# Altium PCB biv2-LRP_1a.PcbDoc
Units mm, origin at the board's own origin, x right, y up, seen from the top; angles counter-clockwise.
Board outline 54 x 54 mm, 2 copper layers (Top Layer, Bottom Layer), stack 1.535 mm thick; 53 components, 21 nets, 124 pads, 67 vias.
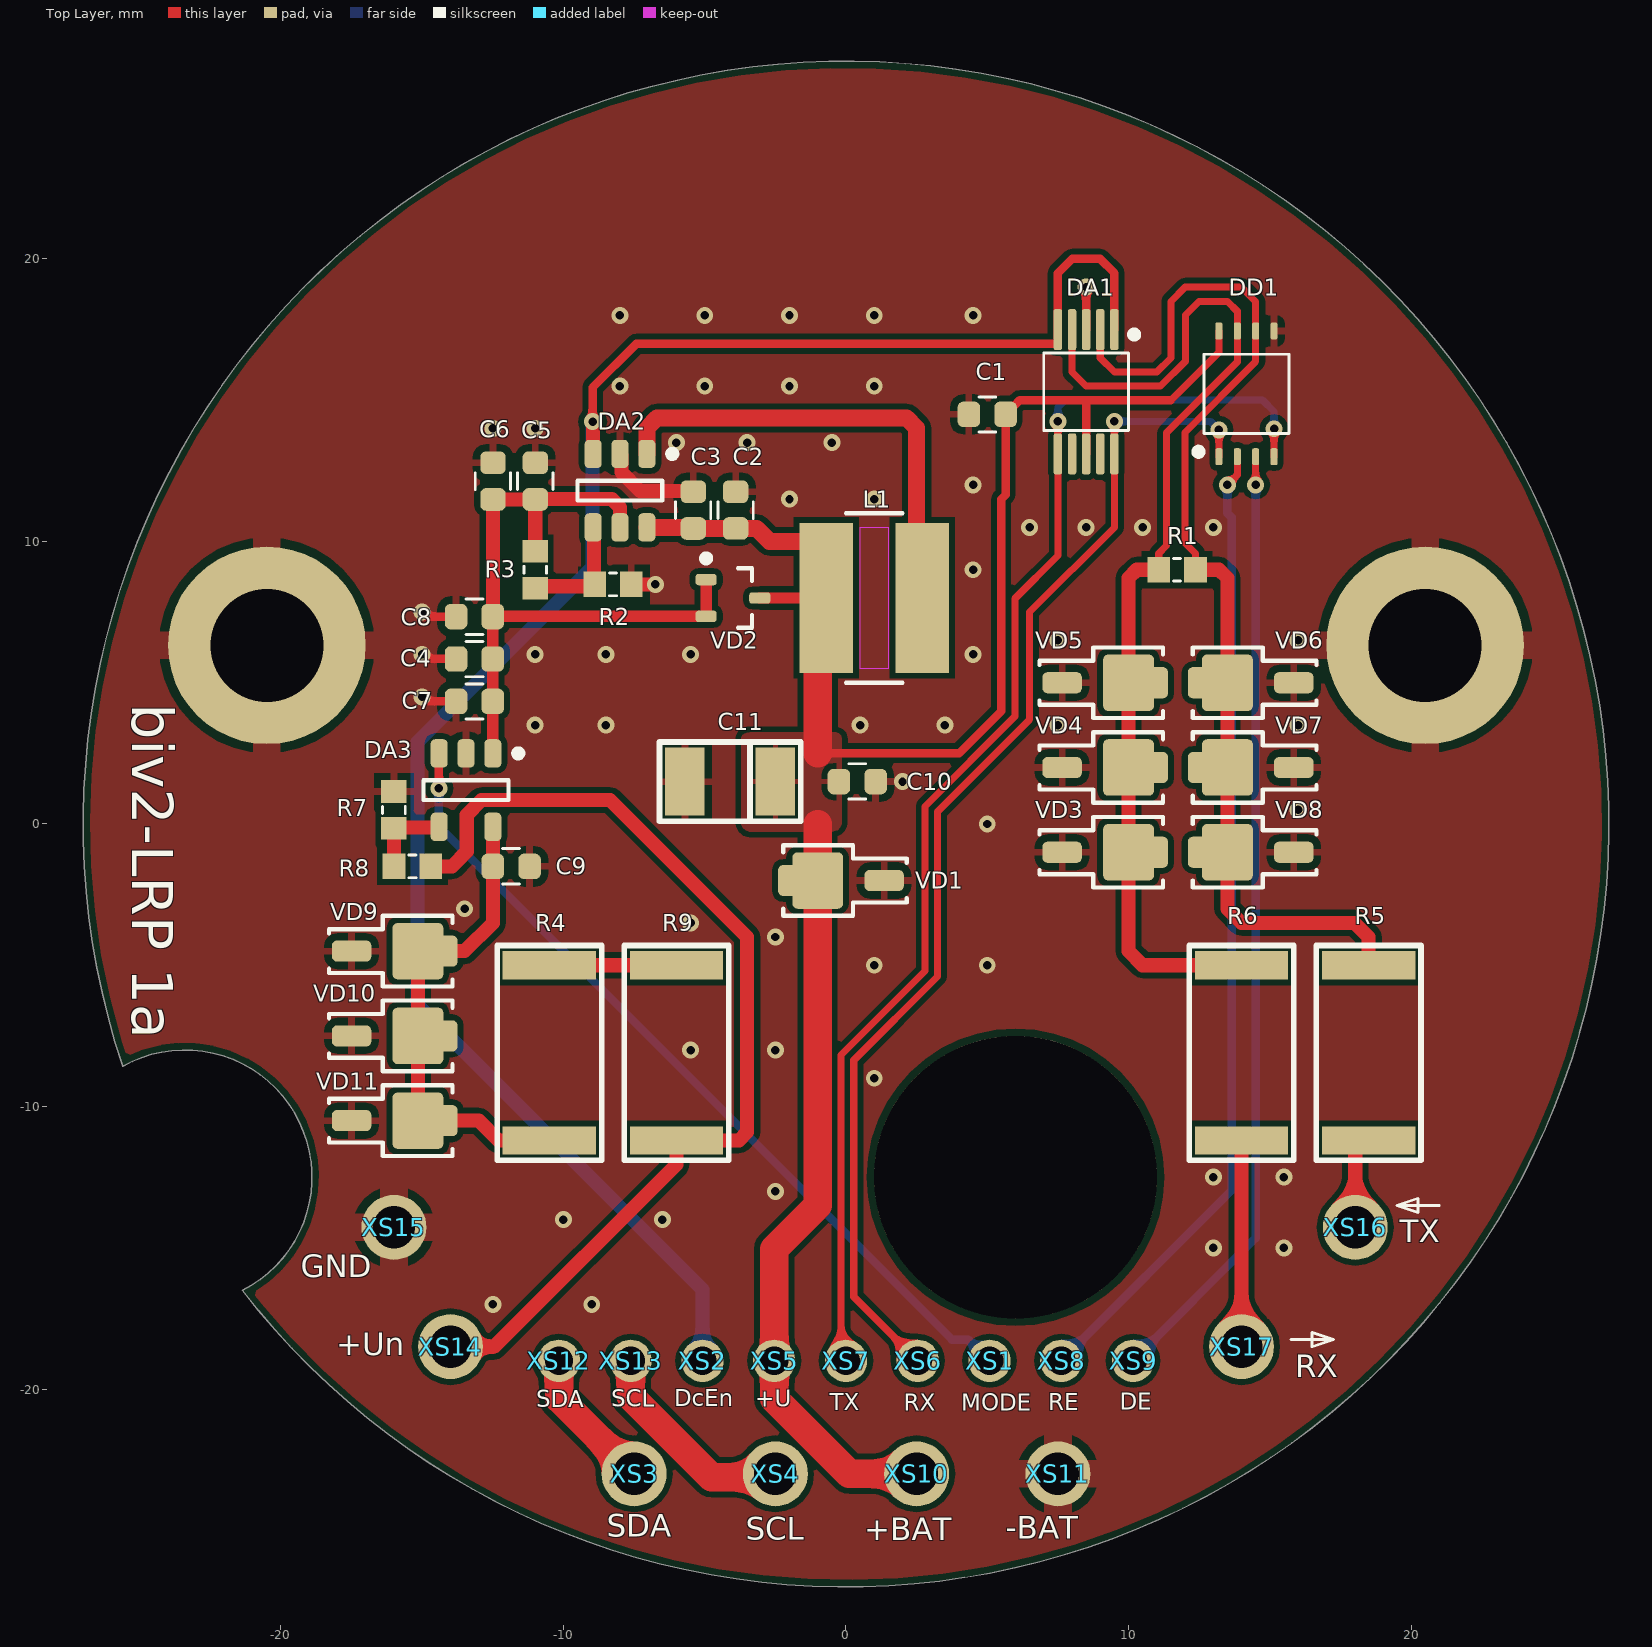
[diagram p0: Top Layer view]
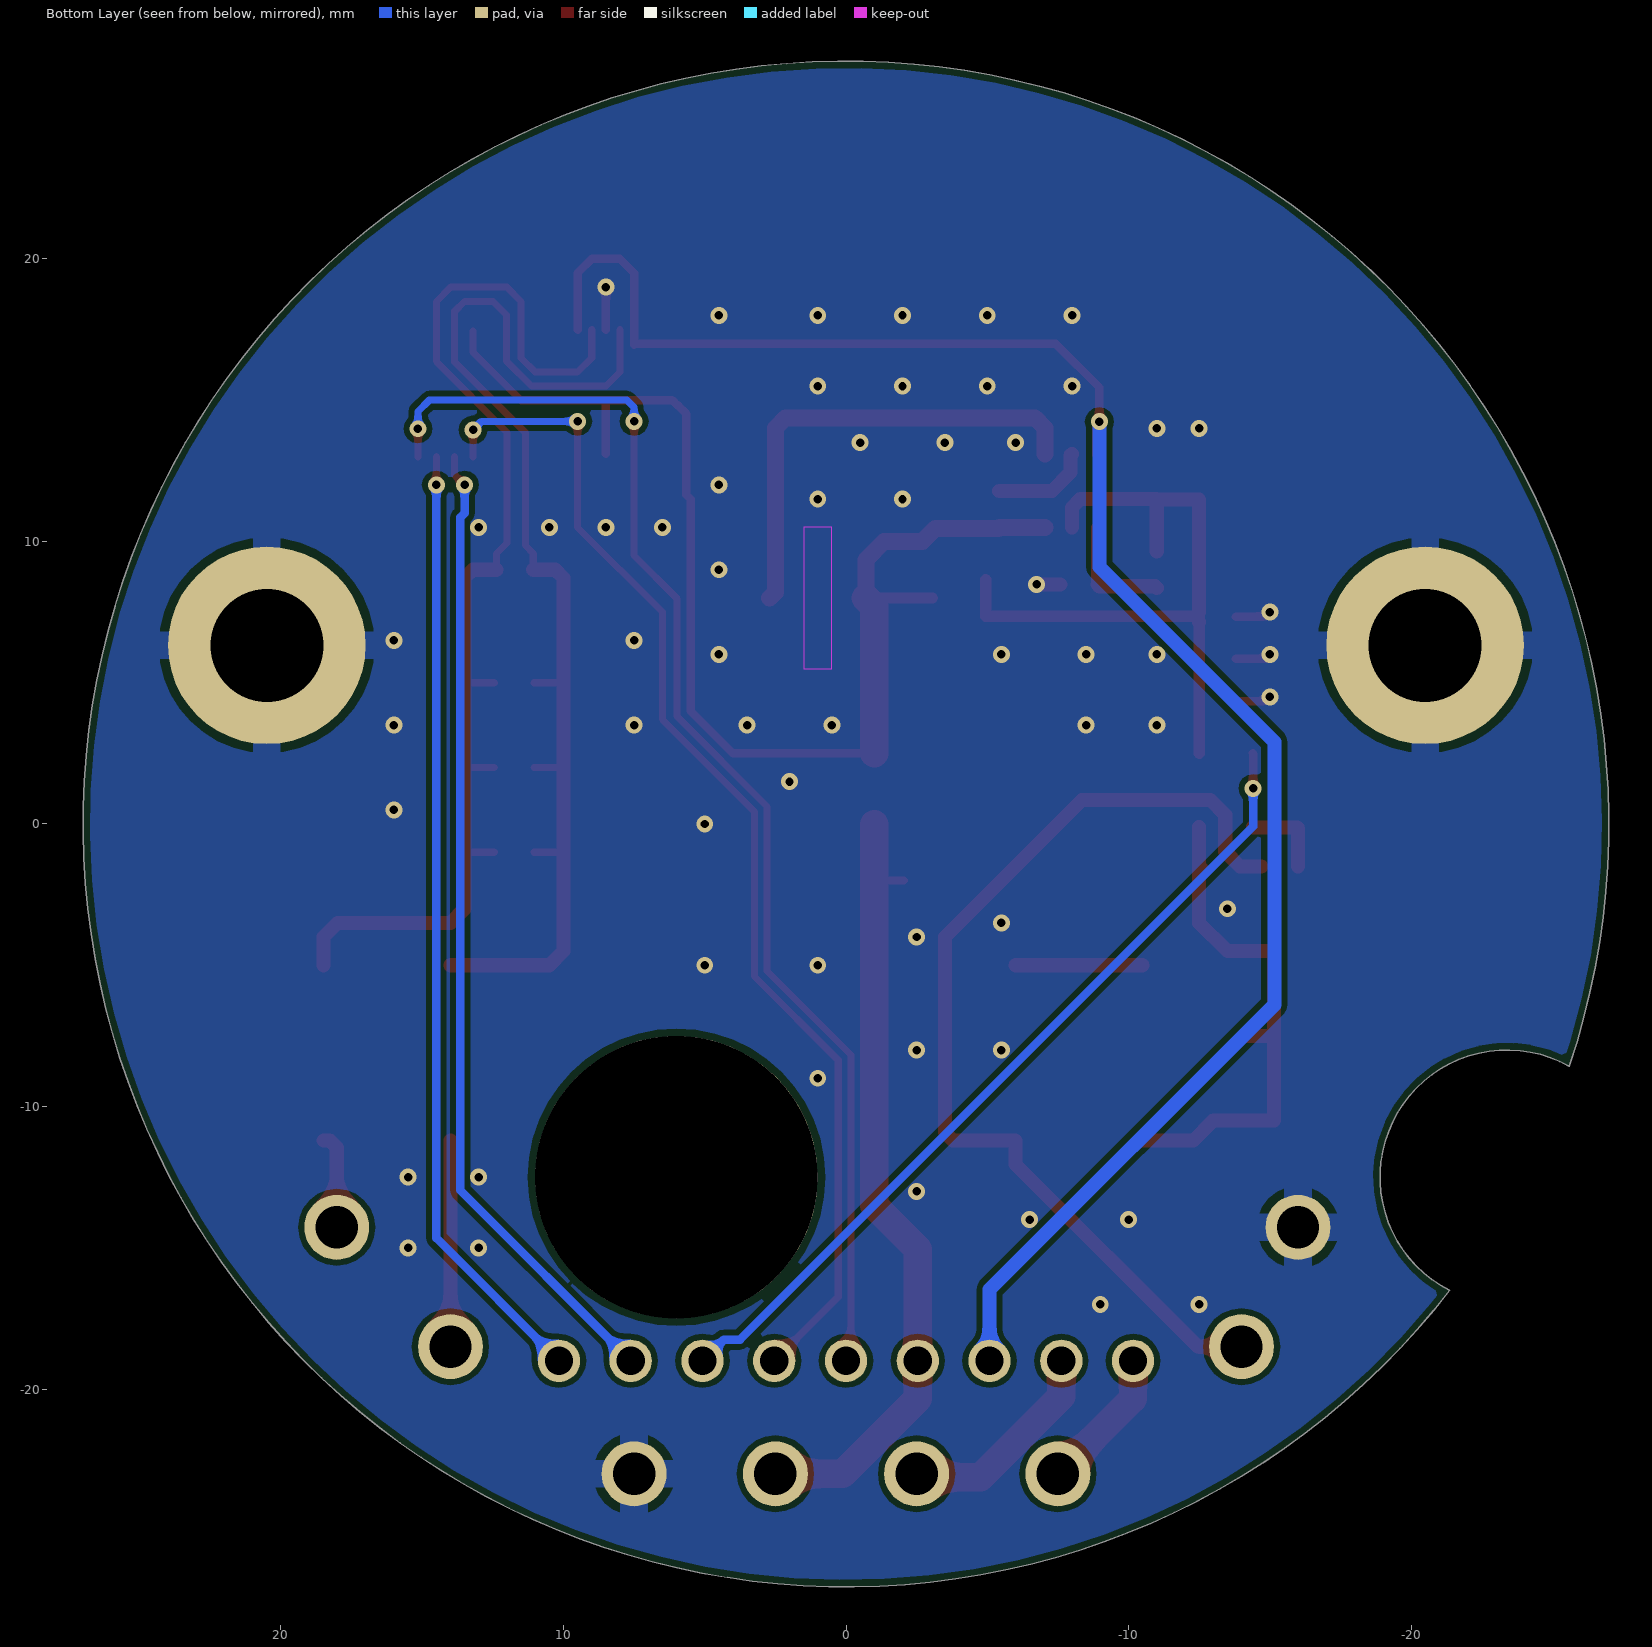
[diagram p1: Bottom Layer view, seen from below]

## Layer stack, top to bottom
Top Solder: solder mask 0.0254, SM-001, Dk 4
Top Layer: signal copper 0.018
Dielectric 1: core 1.4986, Core-043, Dk 4.3
Bottom Layer: signal copper 0.018
Bottom Solder: solder mask 0.0254, SM-001, Dk 4

## Board outline
-21.365,-16.509 ccw(c0,0) -25.604,-8.568 -25.598,-8.572 cw(c-23.402,-12.5)

## Design rules (kind name [scope] priority, off if disabled: settings)
AcuteAngle [All] p1: minimum=3.50000000000000E+0001 checktracksonly=FALSE
BoardOutlineClearance "BoardOutlineClearance 1" [All] p1: gap=0.25 ignorepadtopadclearanceinfootprint=FALSE except(0: Arc-SplitContinuation Track-SplitContinuation SMDPad-SplitContinuation THPad-SplitContinuation Via-SplitContinuation Fill-SplitContinuation Poly-SplitContinuation Region-SplitContinuation Text-SplitContinuation) // Milling
BoardOutlineClearance "BoardOutlineClearance 2" [All] p2: gap=0.4 ignorepadtopadclearanceinfootprint=FALSE except(0: Arc-SplitContinuation Track-SplitContinuation SMDPad-SplitContinuation THPad-SplitContinuation Via-SplitContinuation Fill-SplitContinuation Poly-SplitContinuation Region-SplitContinuation Text-SplitContinuation) // V-Cut
Clearance "Clearance-1 1 Oz" [All] p1: gap=0.2 ignorepadtopadclearanceinfootprint=TRUE except(0.25: Arc-Hole Track-Hole SMDPad-Hole THPad-Hole Via-Hole Fill-Hole Poly-Hole Region-Hole Text-Hole) // Standart
Clearance "Clearance-1 1/2 Oz" [All] p2: gap=0.125 ignorepadtopadclearanceinfootprint=FALSE except(0.2: Arc-Fill Arc-Poly Track-Fill Track-Poly SMDPad-SMDPad SMDPad-Fill SMDPad-Poly THPad-Fill THPad-Poly Via-Fill Via-Poly Fill-Fill Fill-Poly Poly-Poly Poly-Region Poly-Text; 0.25: Arc-Hole Track-Hole SMDPad-Hole THPad-Hole Via-Hole Fill-Hole Poly-Hole Region-Hole Text-Hole) // Standart
DiffPairsRouting "DiffPairsRouting 1 Oz" [All] p1: maxlimit=0.254 minlimit=0.2 mostfreqgap=0.254 toplayer_minwidth=0.2 toplayer_maxwidth=0.381 toplayer_prefwidth=0.381 bottomlayer_minwidth=0.2 bottomlayer_maxwidth=0.381 bottomlayer_prefwidth=0.381 maxuncoupledlength=12.7
DiffPairsRouting "DiffPairsRouting 1/2 Oz" [All] p2 off: maxlimit=0.254 minlimit=0.1 mostfreqgap=0.254 toplayer_minwidth=0.1 toplayer_maxwidth=0.381 toplayer_prefwidth=0.381 bottomlayer_minwidth=0.1 bottomlayer_maxwidth=0.381 bottomlayer_prefwidth=0.381 maxuncoupledlength=12.7
HoleSize "Minimum HoleSize" [IsPad] p1: absolutevalues=TRUE maxlimit=5.9 minlimit=0.6 maxpercent=80.000 minpercent=20.000
HoleSize "Minimum HoleSize VIA 1" [IsVia] p2: absolutevalues=TRUE maxlimit=5.9 minlimit=0.3 maxpercent=80.000 minpercent=20.000 // Standart
HoleToHoleClearance Hole2HoleClearance [All] p1: gap=0.25 allowstackedmicrovias=FALSE
MinimumAnnularRing "Minimum AR VIA Standart" [IsVia] p1: minimumring=0.15
MinimumAnnularRing "Minimum AR PAD Standart" [IsPAD] p2: minimumring=0.2
MinimumAnnularRing "Minimum AR VIA Advance" [IsVia] p3: minimumring=0.1
MinimumAnnularRing "Minimum AR PAD Advance" [IsPAD] p4: minimumring=0.15
MinimumSolderMaskSliver "SolderMask Bridge Standart" [All] p1: minsoldermaskwidth=0.15 // All Masks
MinimumSolderMaskSliver "SolderMask Bridge Advance" [All] p2: minsoldermaskwidth=0.1 // Mask LDI
PlaneClearance "PlaneClearance 1 Oz" [All] p1: clearance=0.2
PlaneClearance "PlaneClearance-1 1/2 Oz" [All] p2: clearance=0.2 // Standart
PlaneConnect "TermalConnect-1 1 Oz" [All] p1: planeconnectstyle=Relief reliefexpansion=0.2 reliefentries=4 reliefconductorwidth=0.2 reliefairgap=0.2 // Standart
PolygonConnect PolygonConnect_1 [All vs IsNamedPolygon('GND_L01_P007')] p1: thpad.connectstyle=Relief thpad.reliefconductorwidth=1 thpad.reliefentries=4 thpad.polygonreliefangle="90 Angle" thpad.airgapwidth=0.3 smdpad.connectstyle=Relief smdpad.reliefconductorwidth=0.254 smdpad.reliefentries=4 smdpad.polygonreliefangle="90 Angle" smdpad.airgapwidth=0.254 via.connectstyle=Direct via.reliefconductorwidth=0.254 via.reliefentries=4 via.polygonreliefangle="90 Angle" via.airgapwidth=0.254
PolygonConnect [All vs IsNamedPolygon('GND_L02_P008')] p2: thpad.connectstyle=Relief thpad.reliefconductorwidth=1 thpad.reliefentries=4 thpad.polygonreliefangle="90 Angle" thpad.airgapwidth=0.3 smdpad.connectstyle=Relief smdpad.reliefconductorwidth=0.254 smdpad.reliefentries=4 smdpad.polygonreliefangle="90 Angle" smdpad.airgapwidth=0.254 via.connectstyle=Direct via.reliefconductorwidth=0.254 via.reliefentries=4 via.polygonreliefangle="90 Angle" via.airgapwidth=0.254
PolygonConnect "PolygonConnect-1 1 Oz" [All] p3: thpad.connectstyle=Relief thpad.reliefconductorwidth=0.2 thpad.reliefentries=4 thpad.polygonreliefangle="90 Angle" thpad.airgapwidth=0.2 smdpad.connectstyle=Relief smdpad.reliefconductorwidth=0.2 smdpad.reliefentries=4 smdpad.polygonreliefangle="90 Angle" smdpad.airgapwidth=0.2 via.connectstyle=Direct via.reliefconductorwidth=0.254 via.reliefentries=4 via.polygonreliefangle="90 Angle" via.airgapwidth=0.254 // Standart
PolygonConnect "PolygonConnect-1 1/2 Oz" [All] p4: thpad.connectstyle=Relief thpad.reliefconductorwidth=0.15 thpad.reliefentries=4 thpad.polygonreliefangle="90 Angle" thpad.airgapwidth=0.2 smdpad.connectstyle=Relief smdpad.reliefconductorwidth=0.2 smdpad.reliefentries=4 smdpad.polygonreliefangle="90 Angle" smdpad.airgapwidth=0.2 via.connectstyle=Direct via.reliefconductorwidth=0.254 via.reliefentries=4 via.polygonreliefangle="90 Angle" via.airgapwidth=0.254 // Standart
RoutingCorners [All] p1 off: cornerstyle=45-Degree minsetback=2.54 maxsetback=2.54
RoutingVias [All] p1: holewidth=0.3 width=0.6 viastyle="Through Hole" minholewidth=0.2 minwidth=0.4 maxholewidth=5.9 maxwidth=6.4
ShortCircuit [All] p1: allowed=TRUE
SilkToSilkClearance Silk2SilkClearance [All] p1 off: silktosilkclearance=0.15
SilkToSolderMaskClearance Silk2SolderMaskClearance [IsPad] p1 off: minsilkscreentomaskgap=0.15 clearancetoexposedcopper=TRUE
SolderMaskExpansion SolderMaskExpansion-1 [All] p1: expansion=0.05 istentingtop=FALSE // Standart
SolderMaskExpansion "SolderMaskExpansion LDI" [All] p2: expansion=0.025 istentingtop=FALSE // Advance
UnRoutedNet [All] p1: checkbadconnections=TRUE
Width "Width 1 Oz" [All] p1: maxlimit=10 minlimit=0.15 preferedwidth=0.2 checkconnectedcopper=TRUE
Width "Width 1/2 Oz" [All] p2 off: maxlimit=10 minlimit=0.1 preferedwidth=0.125 checkconnectedcopper=TRUE
19 further rules are at their usual default settings.

## Classes and differential pairs
component class Sheet1: C11 DA1 DA2 DA3 DC DD1 GND L1 R1 R2 R3 R4 R5 R6 R7 R8 R9 SCL SDA VD1 VD2 VD3 VD4 VD5 VD6 VD7 VD8 VD9 VD10 VD11 Vdd XS1 XS2 XS3 XS4 XS5 XS6 XS7 XS8 XS9 XS10 XS11 XS12 XS13 XS14 XS15 XS16 XS17

## Components (designator, comment, footprint, x,y, rotation, side; value= is the part's Value field where it differs from the comment)
C1 "Ceramic capacitor, 1uF, X7R, ±10%, 16V, 0603, -55...+125°C" "CAP: 0603" 5,14.5 r0 top value=1uF
C2 "Ceramic capacitor, 4.7uF, X7R, ±10%, 10V, 0603, -55...+125°C" "CAP: 0603" -3.905,11.111 r270 top value=4.7uF
C3 "Ceramic capacitor, 4.7uF, X7R, ±10%, 10V, 0603, -55...+125°C" "CAP: 0603" -5.405,11.111 r270 top value=4.7uF
C4 "Ceramic capacitor, 0.1uF, X7R, ±10%, 50V, 0603, -55...+125°C" "CAP: 0603" -13.152,5.841 r0 top value=0.1uF
C5 "Ceramic capacitor, 4.7uF, X7R, ±10%, 10V, 0603, -55...+125°C" "CAP: 0603" -10.995,12.137 r270 top value=4.7uF
C6 "Ceramic capacitor, 4.7uF, X7R, ±10%, 10V, 0603, -55...+125°C" "CAP: 0603" -12.495,12.137 r270 top value=4.7uF
C7 "Ceramic capacitor, 4.7uF, X7R, ±10%, 10V, 0603, -55...+125°C" "CAP: 0603" -13.152,4.341 r0 top value=4.7uF
C8 "Ceramic capacitor, 4.7uF, X7R, ±10%, 10V, 0603, -55...+125°C" "CAP: 0603" -13.152,7.341 r0 top value=4.7uF
C9 "Ceramic capacitor, 1uF, X7R, ±10%, 16V, 0603, -55...+125°C" "CAP: 0603" -11.85,-1.5 r180 top value=1uF
C10 "Ceramic capacitor, 0.1uF, X7R, ±10%, 50V, 0603, -55...+125°C" "CAP: 0603" 0.4,1.5 r180 top value=0.1uF
C11 "Tantalum capacitor, 68μF, 10V, ±10%, 1.2Ohm, case B (3528), -55...+125°C" "CAP: TANTAL-B" -4.1,1.5 r180 top value=68μF
DA1 "TS5A23159DGS" "VSSSOP-10 - TI" 9.5,17.5 r180 top
DA2 "TPS6107x" SOT23-6 -7.05,10.5 r180 top
DA3 "TPS78001DDC" SOT23-5 -13.45,1.2 r180 top
DD1 "MAX3471" MSOP-8 13.2,13 r0 top
L1 "CDRH4D" "IND: CDRH4D28NP" 1,8 r90 top value=4.7u
R1 "Resistor film, 120R, ±5%, 0603, 0.1W, -55...+125°C" "RES: 0603" 11.72,9 r180 top value=120R
R2 "Resistor film, 160K, ±5%, 0603, 0.1W, -55...+125°C" "RES: 0603" -8.249,8.48 r180 top value=160K
R3 "Resistor film, 1.2M, ±5%, 0603, 0.1W, -55...+125°C" "RES: 0603" -11,9 r90 top value=1.2M
R4 "Resistor film, 12, ±5%, 2512, 1W, -55...+125°C" "RES: 2512" -10.5,-8.1 r90 top value=12
R5 "Resistor film, 100, ±5%, 2512, 1W, -55...+125°C" "RES: 2512" 18.5,-8.1 r270 top value=100
R6 "Resistor film, 100, ±5%, 2512, 1W, -55...+125°C" "RES: 2512" 14,-8.1 r270 top value=100
R7 "Resistor film, 560K, ±5%, 0603, 0.1W, -55...+125°C" "RES: 0603" -16,0.5 r270 top value=560K
R8 "Resistor film, 1M, ±5%, 0603, 0.1W, -55...+125°C" "RES: 0603" -15.35,-1.5 r180 top value=1M
R9 "Resistor film, 12, ±5%, 2512, 1W, -55...+125°C" "RES: 2512" -6,-8.1 r270 top value=12
VD1 "SM2T" DO216-AA -1,-2 r0 top
VD2 "BAT54AW" SC-70 -4,8 r270 top
VD3 "SM2T" DO216-AA 10,-1 r180 top
VD4 "SM2T" DO216-AA 10,2 r180 top
VD5 "SM2T" DO216-AA 10,5 r180 top
VD6 "SM2T" DO216-AA 13.5,5 r0 top
VD7 "SM2T" DO216-AA 13.5,2 r0 top
VD8 "SM2T" DO216-AA 13.5,-1 r0 top
VD9 "SM2T" DO216-AA -15.15,-4.5 r180 top
VD10 "SM2T" DO216-AA -15.15,-7.5 r180 top
VD11 "SM2T" DO216-AA -15.15,-10.5 r180 top
XS1 "Testpoint_HS1mm" "TestPoint(without 3D)"#1 5.08,-19 r0 top locked
XS2 "Testpoint_HS1mm" "TestPoint(without 3D)"#1 -5.08,-19 r0 top locked
XS3 "Testpoint_HS1mm" "TestPoint(without 3D)"#2 -7.5,-23 r0 top locked
XS4 "Testpoint_HS1mm" "TestPoint(without 3D)"#2 -2.5,-23 r0 top locked
XS5 "Testpoint_HS1mm" "TestPoint(without 3D)"#1 -2.54,-19 r0 top locked
XS6 "Testpoint_HS1mm" "TestPoint(without 3D)"#1 2.54,-19 r0 top locked
XS7 "Testpoint_HS1mm" "TestPoint(without 3D)"#1 0,-19 r0 top locked
XS8 "Testpoint_HS1mm" "TestPoint(without 3D)"#1 7.62,-19 r0 top locked
XS9 "Testpoint_HS1mm" "TestPoint(without 3D)"#1 10.16,-19 r0 top locked
XS10 "Testpoint_HS1mm" "TestPoint(without 3D)"#2 2.5,-23 r90 top locked
XS11 "Testpoint_HS1mm" "TestPoint(without 3D)"#2 7.5,-23 r0 top locked
XS12 "Testpoint_HS1mm" "TestPoint(without 3D)"#1 -10.16,-19 r90 top locked
XS13 "Testpoint_HS1mm" "TestPoint(without 3D)"#1 -7.62,-19 r90 top locked
XS14 "Testpoint_HS1mm" "TestPoint(without 3D)"#2 -14,-18.5 r90 top locked
XS15 "Testpoint_HS1mm" "TestPoint(without 3D)"#2 -16,-14.275 r90 top locked
XS16 "Testpoint_HS1mm" "TestPoint(without 3D)"#2 18.025,-14.275 r90 top locked
XS17 "Testpoint_HS1mm" "TestPoint(without 3D)"#2 14,-18.5 r90 top locked

## Footprints (in the part's own frame and the unit in brackets; to place one, negate y for a bottom-side part, rotate by r counter-clockwise, add the part's x,y. Pads: shape width x height; smd on the part's side, far side on the other; paste and mask are expansions set on the pad)
"CAP: 0603" [mm]
  rrect50% 0.8x0.9 smd: 1(-0.65,0) 2(0.65,0)
  silkscreen extent -0.3,-0.63 0.3,0.62, body extent -0.78,-0.43 0.83,0.44, height 0.8
"CAP: TANTAL-B" [mm]
  rect 1.4x2.4 smd: 1(-1.6,0) 2(1.6,0)
  silkscreen extent -2.5,-1.4 2.5,1.4, body extent -1.85,-1.46 1.85,1.47, height 2.03
DO216-AA [mm] "Molded Diode, 2-Leads, Body 3,75x1,9mm, IPC Medium Density"
  rrect50% 0.7x1.1 smd: 1(-1.05,0)
  rrect20% 1.8x2 smd: 1(0,0)
  rrect50% 1.4x0.75 smd: 2(2.35,0)
  silkscreen extent -1.23,-1.25 3.15,1.25, body extent -0.85,-0.85 0.85,0.85, height 1
"IND: CDRH4D28NP" [mm]
  rect 5.3x1.9 smd: 1(0,1.7) 2(0,-1.7)
  silkscreen extent -3,-1 3,1, body extent -2.45,-2.45 2.45,2.45, height 2.91
MSOP-8 [mm] "MSOP, 8-Leads, Body 3,0x3,0mm (max), Pitch 0,650mm, IPC Medium Density"
  rrect50% 0.25x0.6 smd: 1(0,0) 2(0.65,0) 3(1.3,0) 4(1.95,0) 5(1.95,4.45) 6(1.3,4.45) 7(0.65,4.45) 8(0,4.45)
  silkscreen extent -0.85,0.05 2.47,3.62, body extent -0.58,-0.23 2.53,4.67, height 1.1
"RES: 0603" [mm]
  rect 0.8x0.9 smd: 1(-0.65,0) 2(0.65,0)
  silkscreen extent -0.13,-0.4 0.13,0.4, body extent -0.8,-0.4 0.8,0.4, height 0.44
"RES: 2512" [mm]
  rect 1x3.3 smd: 1(-3.1,0) 2(3.1,0)
  silkscreen extent -3.8,-1.85 3.8,1.85, body extent -3.17,-1.6 3.17,1.6, height 0.52
SC-70 [mm] "SC-70, 3-Leads, Body 2,1x1,4mm (max), Pitch 0,65mm, IPC High Density"
  rrect50% 0.4x0.75 smd: 1(-0.65,-0.95) 2(0.65,-0.95) 3(0,0.95)
  silkscreen extent -1.52,-1.07 1.05,0.67, body extent -1.05,-1 1.05,1.1, height 1.1
SOT23-5 [mm] "SOT23, 5-Leads, Body 3,0x3,0mm (max), Pitch 0,95mm, IPC High Density"
  rrect50% 0.6x1 smd: 1(-0.95,-1.3) 2(0,-1.3) 3(0.95,-1.3) 4(0.95,1.3) 5(-0.95,1.3)
  silkscreen extent -1.98,-1.42 1.5,0.35, body extent -1.51,-1.4 1.51,1.4, height 1.25
SOT23-6 [mm] "SOT23, 6-Leads, Body 3,0x3,0mm (max), Pitch 0,95mm, IPC High Density"
  rrect50% 0.6x1 smd: 1(0,-2.6) 2(0.95,-2.6) 3(1.9,-2.6) 4(1.9,0) 5(0.95,0) 6(0,0)
  silkscreen extent -1.03,-2.72 2.45,-0.95, body extent -0.56,-2.7 2.46,0.1, height 1.25
"TestPoint(without 3D)"#1 [mm]
  round 1.5 hole 1: 1(0,0)
"TestPoint(without 3D)"#2 [mm]
  round 2.3 hole 1.5: 1(0,0)
"VSSSOP-10 - TI" [mm] "MSOP, 10-Leads, Body 3,0x3,0mm (max), Pitch 0,50mm, IPC Medium Density"
  rrect50% 0.3x1.45 smd: 1(0,0) 2(0.5,0) 3(1,0) 4(1.5,0) 5(2,0) 6(2,4.4) 7(1.5,4.4) 8(1,4.4) 9(0.5,4.4) 10(0,4.4)
  silkscreen extent -0.83,0.05 2.5,3.57, body extent -0.55,-0.23 2.55,4.67, height 1.1

## Part data
C1 C9: library part Ceramic_0603, Manufacturer=Yageo, Package=0603, PartNumber=CC0603KRX7R7BB104, Temperature=-55...+125°C, Tolerance=±10%, TypeCapacitor="Ceramic capacitor", TypeDielectric=X7R, Voltage=16V, HelpURL=https://www.digikey.com/product-detail/en/yageo/CC0603KRX7R7BB104/311-1088-1-ND/302998, ValueManufacturerPartNumber="Ceramic capacitor, 1uF, X7R, ±10%, 16V, 0603, -55...+125°C"
C2 C3 C5 C6 C7 C8: library part Ceramic_0603, Manufacturer=Yageo, Package=0603, PartNumber=CC0603KRX7R7BB104, Temperature=-55...+125°C, Tolerance=±10%, TypeCapacitor="Ceramic capacitor", TypeDielectric=X7R, Voltage=10V, HelpURL=https://www.digikey.com/product-detail/en/yageo/CC0603KRX7R7BB104/311-1088-1-ND/302998, ValueManufacturerPartNumber="Ceramic capacitor, 4.7uF, X7R, ±10%, 10V, 0603, -55...+125°C"
C4 C10: library part Ceramic_0603, Manufacturer=Yageo, Package=0603, PartNumber=CC0603KRX7R7BB104, Temperature=-55...+125°C, Tolerance=±10%, TypeCapacitor="Ceramic capacitor", TypeDielectric=X7R, Voltage=50V, HelpURL=https://www.digikey.com/product-detail/en/yageo/CC0603KRX7R7BB104/311-1088-1-ND/302998, ValueManufacturerPartNumber="Ceramic capacitor, 0.1uF, X7R, ±10%, 50V, 0603, -55...+125°C"
C11: library part Tantal_B, Manufacturer=AVX, Package="case B (3528)", PartNumber=F930J227KBA, Temperature=-55...+125°C, Tolerance=±10%, TypeCapacitor="Tantalum capacitor", TypeDielectric=X7R, Voltage=10V, HelpURL=https://www.digikey.com/product-detail/en/avx-corporation/F930J227KBA/478-8166-1-ND/4005570, Impedance=1.2Ohm, ValueManufacturerPartNumber="Tantalum capacitor, 68μF, 10V, ±10%, 1.2Ohm, case B (3528), -55...+125°C"
DA1: "Микросхема", Manufacturer="Texas Instruments", PartNumber=TS5A23159DGS
DA2: library part TPS61070, "Микросхема", Manufacturer="Texas Instruments", ComponentLink1Description="Data Sheet", PartNumber=TPS6107x
DA3: "Микросхема", Manufacturer="Texas Instruments", Part Number=TPS780270200DDCT, ComponentLink1Description="Data Sheet", ComponentLink1URL=http://focus.ti.com/lit/ds/symlink/tps780270200.pdf
DD1: "RS-485/RS422Half-Duplex,  Differential Transceiver for Battery-Powered Systems", Manufacturer=MAXIM, ComponentLink1Description="Data Sheet", ComponentLink1URL=\\Mskd20virt\KB\PDF\Интерфейсы\RS232_485\MAX3471.pdf, ComponentLink2Description="Replacement 1 Data Sheet", PartNumber=MAX3471
L1: library part CDRH4D28NP, ComponentLink1Description=Datasheet, ComponentLink1URL=https://products.sumida.com/products/pdf/CDRH4D28.pdf
R1 R2 R3 R7 R8: library part Resistor_0603, Manufacturer=Yageo, Package=0603, PartNumber=RC0603JR-07100RL, Power=0.1W, Temperature=-55...+125°C, Tolerance=±5%, TypeResistor="Resistor film", HelpURL=https://www.digikey.com/product-detail/en/yageo/RC0603JR-07100RL/311-100GRCT-ND/729644
  R1: ValueManufacturerPartNumber="Resistor film, 120R, ±5%, 0603, 0.1W, -55...+125°C"
  R2: ValueManufacturerPartNumber="Resistor film, 160K, ±5%, 0603, 0.1W, -55...+125°C"
  R3: ValueManufacturerPartNumber="Resistor film, 1.2M, ±5%, 0603, 0.1W, -55...+125°C"
  R7: ValueManufacturerPartNumber="Resistor film, 560K, ±5%, 0603, 0.1W, -55...+125°C"
  R8: ValueManufacturerPartNumber="Resistor film, 1M, ±5%, 0603, 0.1W, -55...+125°C"
R4 R5 R6 R9: library part Resistor_2512, Manufacturer=Yageo, Package=2512, PartNumber=RC2512JK-07100RL, Power=1W, Temperature=-55...+125°C, Tolerance=±5%, TypeResistor="Resistor film", HelpURL=https://www.digikey.com/product-detail/en/yageo/RC2512JK-07100RL/YAG3393CT-ND/5962215
  R4 R9: ValueManufacturerPartNumber="Resistor film, 12, ±5%, 2512, 1W, -55...+125°C"
  R5 R6: ValueManufacturerPartNumber="Resistor film, 100, ±5%, 2512, 1W, -55...+125°C"
VD1 VD3 VD4 VD5 VD6 VD7 VD8 VD9 VD10 VD11: "TVS Диод", Manufacturer="ST Microelectronics", ComponentLink1Descriprion="Data Sheet", ComponentLink2Description="Replacement 1 Data Sheet", ComponentLink3Description="Replacement 2 Data Sheet"
VD2: "Сборка диодная", Manufacturer=NXP, Package=SC-70, ReplacementPart1Manufacturer="ON Semiconductor", ReplacementPart1PartNumber=BAT54AWT1G, ReplacementPart2Manufacturer=Infineon, ReplacementPart2PartNumber=BAT54-06W, ComponentLink1Description=DataSheet, ComponentLink1URL=http://www.nxp.com/documents/data_sheet/BAT54W.pdf, ComponentLink2Description=Replacement1DataSheet, ComponentLink2URL=http://www.onsemi.com/pub_link/Collateral/BAT54AWT1-D.PDF, ComponentLink3Description=Replacement2DataSheet, ComponentLink3URL=http://www.infineon.com/dgdl/bat54series.pdf?folderId=db3a30431400ef68011425f1ca2505e3&fileId=db3a304314dca3890115190b74210ea6, PartNumber=BAT54AW, ReplacementPart1TopMarking=B7*, ReplacementPart2TopMarking=TA, TopMarking=42

## Free pads (board coordinates)
  round 7 hole 4: 0(-20.5,6.325) 0(20.5,6.325)
  round 10 hole 10 unplated paste+0: 1(6,-12.5)

## Via types
v1: diameter 0.6, hole 0.3, Top Layer to Bottom Layer, tented both sides, 67 vias

## Nets (pads, with @x,y where several pads share a name; then routed paths per layer and width w, separated by ;. In a path a pad name is that pad's centre, name@x,y a point inside that pad or via, vN(x,y) a via of type N, cw(c..) or ccw(c..) an arc to the next point about the centre after c; other vN are vias at no path point)
+U: C1.2 C2.2 C3.2 C10.2 C11.1 DA1.8 DA2.6 DD1.8 L1.1 VD1.1 VD2.3 XS5.1 XS10.1 | length 72.6
  Top Layer w0.25: 11.5,15 13.2,16.7 DD1.8
  Top Layer w0.3: VD1.1@-2.05,-2 VD1.1@-1,-2 ; -0.5,2.5 4,2.5 5.5,4 5.5,11.5 5.65,11.65 C1.2 5.65,14.523 5.927,14.8 5.946,14.8 6.146,15 8.5,15 ; DA1.8 8.5,15 ; 11.5,15 8.5,15
  Top Layer w0.4: VD2.3 L1.1
  Top Layer w0.6: DA2.6 DA2.6@-7,10.5 ; DA2.6@-6.996,10.496 -5.428,10.496 C3.2@-5.424,10.493 ; C3.2 C2.2 -3.161,10.461 -2.7,10 -1.35,10 -0.7,9.35 L1.1
  Top Layer w1: -1,0 -1,-2 -1,-13.5 -2.54,-15.04 -2.54,-20.344 0.116,-23 XS10.1 ; -1,2.5 -1,7.7 L1.1
DC_EN: DA1.1 DA1.5 DA2.3 XS2.1 | length 66.4
  Top Layer w0.3: v1(-8.969,14.24) -8.969,15.45 -7.419,17 DA1.5@7.5,17 ; DA1.5@7.5,16.957 DA1.5@7.5,17 ; DA1.1 9.5,19.5 9,20 8,20 7.5,19.5 DA1.5 DA1.5@7.5,17
  Top Layer w0.5: v1(-8.969,14.24) -8.959,14.231 -8.959,13.109 DA2.3
  Bottom Layer w0.5: v1(-8.969,14.24) -8.969,9.092 -15.161,2.899 -15.161,-6.399 -5.08,-16.481 XS2.1
DE: DD1.3 XS9.1 | length 33.8
  Top Layer w0.25: v1(14.5,12) DD1.3
  Bottom Layer w0.3: XS9.1 14.5,-14.66 v1(14.5,12)
GND: C1.1 C2.1 C3.1 C4.1 C5.1 C6.1 C7.1 C8.1 C9.1 C10.1 C11.2 DA1.3 DA2.2 DA3.2 DD1.5 pad.0 R2.1 R7.1 VD1.2 VD3.2 VD4.2 VD5.2 VD6.2 VD7.2 VD8.2 VD9.2 VD10.2 VD11.2 XS11.1 XS15.1 | length 9.6
  Top Layer w0.3: v1(-15,4.5) -14.919,4.5 -14.76,4.341 C7.1 ; v1(-15,6) -14.841,5.841 C4.1 ; v1(-15,7.5) -14.919,7.5 -14.76,7.341 C8.1 ; DA1.3 v1(8.5,19)
  Top Layer w0.5: DA2.2 -7.95,13.05 -7.95,12.45 -7.293,11.793 C3.1@-5.424,11.793 ; R2.1 v1(-6.749,8.48)
  other v1: -12.5,-17 -9,-17 13,-15 15.5,-15 -10,-14 -6.5,-14 -2.5,-13 13,-12.5 15.5,-12.5 1,-9 -5.5,-8 -2.5,-8 1,-5 5,-5 -2.5,-4 -5.5,-3.5 -13.5,-3 5,0 16,0.5 2,1.5 -11,3.5 -8.5,3.5 0.5,3.5 3.5,3.5 7.5,3.5 16,3.5 -11,6 -8.5,6 -5.5,6 4.5,6 7.5,6.5 16,6.5 4.5,9 6.5,10.5 8.5,10.5 10.5,10.5 13,10.5 -2,11.5 1,11.5 4.5,12 -6,13.5 -3.5,13.5 -0.5,13.5 -12.5,14 -11,14 -8,15.5 -5,15.5 -2,15.5 1,15.5 -8,18 -5,18 -2,18 1,18 4.5,18
MODE: DA3.3 XS1.1 | length 29.9
  Top Layer w0.3: v1(-14.411,1.258) -14.411,2.489 DA3.3
  Bottom Layer w0.3: v1(-14.411,1.258) -14.411,-0.089 3.75,-18.25 4.33,-18.25 XS1.1
NetC4_2: C4.2 C5.2 C6.2 C7.2 C8.2 DA2.5 DA3.1 R3.2 VD2.1 VD2.2 | length 24.9
  Top Layer w0.4: C8.2 C4.2 C7.2 C7.2 -12.501,2.501 DA3.1 ; C8.2@-12.498,7.5 -12.348,7.35 VD2.2 VD2.1
  Top Layer w0.5: C8.2@-12.5,7.15 C8.2@-12.498,7.152 ; C8.2@-12.498,7.5 -12.498,11.484 C6.2 C5.2@-11,11.487 ; R3.2 C5.2@-11,11.487 ; C5.2 C5.2@-11,11.487 ; DA2.5 -8,11.207 -8.293,11.5 -11,11.5 C5.2@-11,11.487
NetC9_2: C9.2 DA3.5 R4.1 VD9.1 VD10.1 VD11.1 | length 18.7
  Top Layer w0.5: VD9.1@-15.075,-4.425 VD9.1@-15.15,-4.5 ; VD10.1@-14.1,-7.5 VD10.1@-15.15,-7.5 ; C9.2@-12.575,-1.575 C9.2 ; DA3.5 C9.2 ; R4.1 -12.3,-11.2 -13,-10.5 -14.1,-10.5 -15.15,-10.5 VD10.1@-15.15,-7.5 ; VD10.1@-15.15,-7.5 VD9.1@-15.15,-4.5 ; VD9.1@-15.15,-4.5 -14.1,-4.5 -13.5,-4.5 -12.5,-3.5 C9.2
NetDA1_2: DA1.2 DD1.6 R1.1 R5.1 VD6.1 VD7.1 VD8.1 | length 42.5
  Top Layer w0.25: DA1.2 9,16.5 9.5,16 11,16 11.5,16.5 11.5,18.5 12,19 14,19 14.5,18.5 DD1.6 14.5,16.364 12,13.864 12,9.945 12.37,9.575 R1.1 ; VD8.1@12.45,-1 VD8.1@13.5,-1 ; VD7.1@12.45,2 VD7.1@13.5,2 ; VD6.1@12.45,5 VD6.1@13.5,5
  Top Layer w0.5: R1.1 13.207,9 13.5,8.707 13.5,5 13.5,2 13.5,-1 13.5,-3 14,-3.5 18,-3.5 18.5,-4 R5.1
NetDA1_4: DA1.4 DD1.7 R1.2 R6.1 VD3.1 VD4.1 VD5.1 | length 42
  Top Layer w0.25: DA1.4 8,16 8.5,15.5 11.136,15.5 12.014,16.377 12.014,18.014 12.5,18.5 13.5,18.5 13.85,18.15 DD1.7 13.85,16.35 11.35,13.85 11.35,9.855 11.07,9.575 R1.2 ; VD3.1@10,-1 VD3.1@11.05,-1 ; VD4.1@10,2 VD4.1@11.05,2 ; VD5.1@10,5 VD5.1@11.05,5
  Top Layer w0.5: R1.2 10.293,9 10,8.707 10,5 10,2 10,-1 10,-4.5 10.5,-5 R6.1
NetDA2_1: DA2.1 L1.2 | length 16.9
  Top Layer w0.6: DA2.1 -7.05,14.02 -6.699,14.371 2.149,14.371 2.5,14.02 2.5,8.2 L1.2
NetDA2_4: DA2.4 R2.2 R3.1 | length 4.2
  Top Layer w0.5: R3.1 -10.935,8.415 -8.964,8.415 R2.2 -8.924,8.506 -8.924,10.474 DA2.4
NetDA3_4: DA3.4 R7.2 R8.2 | length 3
  Top Layer w0.5: R8.2 R7.2 -15.975,-0.125 -14.425,-0.125 DA3.4
NetR4_2: R4.2 R9.1 | length 4.5
  Top Layer w0.5: R4.2 R9.1
NetR5_2: R5.2 XS16.1 | length 3.4
  Top Layer w0.5: XS16.1 18.025,-11.45 18.275,-11.2 R5.2
NetR6_2: R6.2 XS17.1 | length 7.3
  Top Layer w0.5: XS17.1 R6.2
NetR8_1: R8.1 R9.2 XS14.1 | length 36
  Top Layer w0.5: R8.1 -13.95,-1.5 -13.424,-0.974 -13.424,0.324 -12.899,0.85 -8.35,0.85 -3.5,-4 -3.5,-10.907 -3.793,-11.2 R9.2 -6,-12.05 -12.45,-18.5 XS14.1
RE: DD1.2 XS8.1 | length 34.7
  Top Layer w0.25: v1(13.5,12) 13.85,12.35 DD1.2
  Bottom Layer w0.3: XS8.1 13.65,-12.97 13.65,10.85 13.5,11 v1(13.5,12)
RX: DA1.10 DD1.1 XS6.1 | length 42.8
  Top Layer w0.25: XS6.1 0.275,-16.735 0.275,-8.361 3.243,-5.394 3.243,0.435 6.5,3.692 6.5,7.5 9.5,10.5 DA1.10 v1(9.5,14.25) ; DD1.1 v1(13.2,13.95)
  Bottom Layer w0.25: v1(9.5,14.25) 12.9,14.25 v1(13.2,13.95)
SCL_BAT: XS4.1 XS13.1 | length 7.6
  Top Layer w1: XS13.1 -7.62,-20.264 -4.761,-23.122 -2.622,-23.122 XS4.1
SDA_BAT: XS3.1 XS12.1 | length 5.1
  Top Layer w1: XS12.1 -10.16,-20.34 XS3.1
TX: DA1.6 DD1.4 XS7.1 | length 46.5
  Top Layer w0.25: XS7.1 -0.175,-18.825 -0.175,-8.175 2.793,-5.207 2.793,0.621 5.975,3.803 5.975,7.975 7.5,9.5 DA1.6 v1(7.5,14.25) ; DD1.4 v1(15.15,13.99)
  Bottom Layer w0.25: v1(7.5,14.25) 7.5,14.75 7.75,15 14.75,15 15.15,14.6 v1(15.15,13.99)
pads on no net: DA1.7 DA1.9

## Polygon pours and split planes (outlines as drawn)
GND on Top Layer "GND_L01_P007" (solid, pour order 7): -21.365,-16.509 ccw(c0,0) -25.604,-8.568 -25.598,-8.572 cw(c-23.402,-12.5)
+U on Top Layer "+U_L01_P000" (solid, pour order 0): -0.6,3.242 -0.392,3.242 cw(c-0.388,3) -0.146,3.004 -0.146,0.073 cw(c-0.489,0.078) -0.493,-0.266 -3.365,-0.266 cw(c-3.372,0.065) -3.702,0.059 -3.702,0.1 -3.702,3 cw(c-3.468,3) -3.468,3.234 -3.415,3.242
GND on Bottom Layer "GND_L02_P008" (solid, pour order 8): -21.365,-16.509 ccw(c0,0) -25.604,-8.568 -25.598,-8.572 cw(c-23.402,-12.5)

## Keep-outs
Top Layer:
  region: 1.5,10.5
Keep-Out Layer:
  region: 1.5,10.5 1.5,5.5 0.5,5.5 0.5,10.5

## Silkscreen, mask and mechanical layers (free items; w line width, h text height)
Top Overlay:
  lines w0.1: 15.75,-18.25 17.25,-18.25 ; 21,-13.5 19.5,-13.5 ; 17.25,-18.25 16.5,-18.5 16.5,-18 17.25,-18.25 ; 19.5,-13.5 20.25,-13.75 20.25,-13.25 19.5,-13.5
  text "biv2-LRP 1a" at -25.75,4.25 h2.5 r270
  text "TX" at 19.592,-14.798 h0.8
  text "GND" at -19.3,-16.05 h0.8
  text "+Un" at -18.05,-18.8 h0.8
  text "RX" at 15.903,-19.577 h0.8
  text "DcEn" at -6.076,-20.61 h0.6
  text "SDA" at -10.966,-20.648 h0.6
  text "SCL" at -8.317,-20.629 h0.6
  text "+U" at -3.212,-20.629 h0.6
  text "DE" at 9.685,-20.726 h0.6
  text "TX" at -0.582,-20.746 h0.6
  text "RE" at 7.152,-20.746 h0.6
  text "RX" at 2.048,-20.765 h0.6
  text "MODE" at 4.074,-20.765 h0.6
  text "SDA" at -8.476,-25.229 h0.8
  text "-BAT" at 5.663,-25.296 h0.8
  text "SCL" at -3.554,-25.328 h0.8
  text "+BAT" at 0.65,-25.35 h0.8
Board:
  lines w0.1: -25.604,-8.568 cw(c0,0) -21.365,-16.509 ; -25.598,-8.572 cw(c-23.402,-12.5) -21.358,-16.509